# EAGLE board BlueESC (EAGLE 7.1.0)
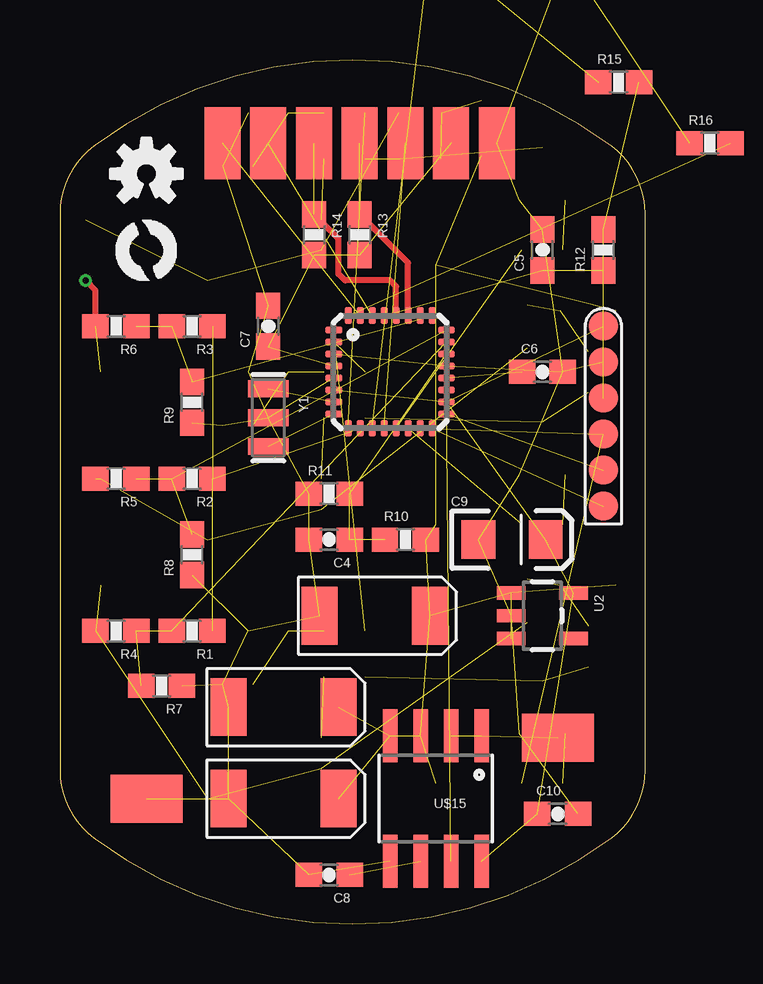
[diagram p0: board, top side]
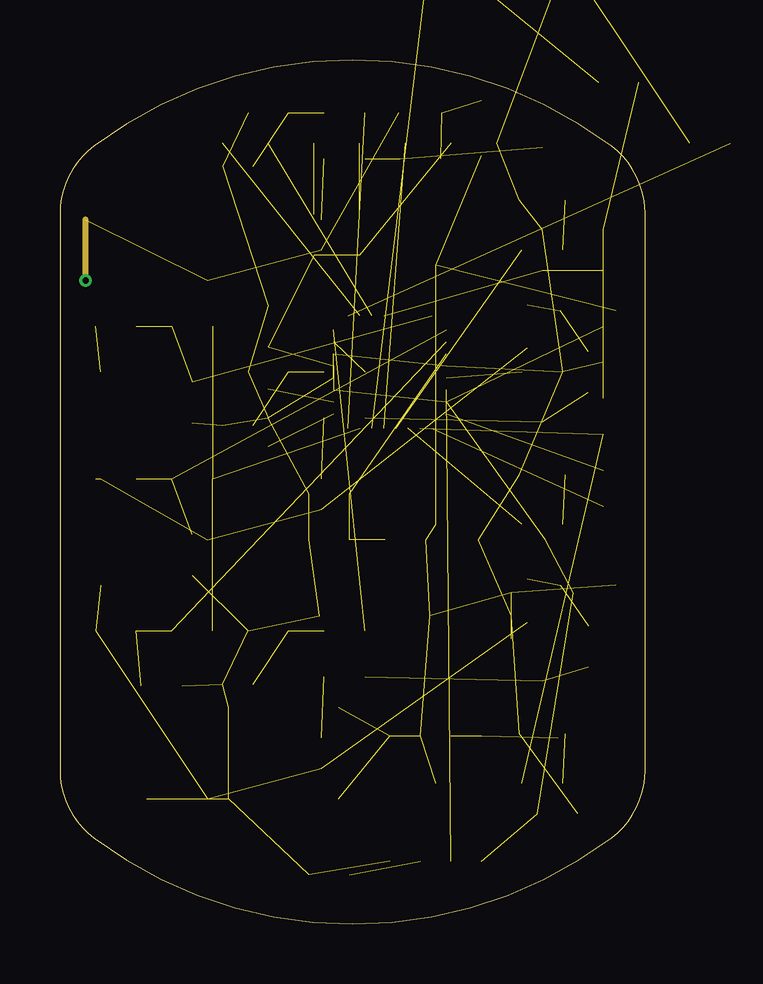
[diagram p1: board, inner layer Route15]
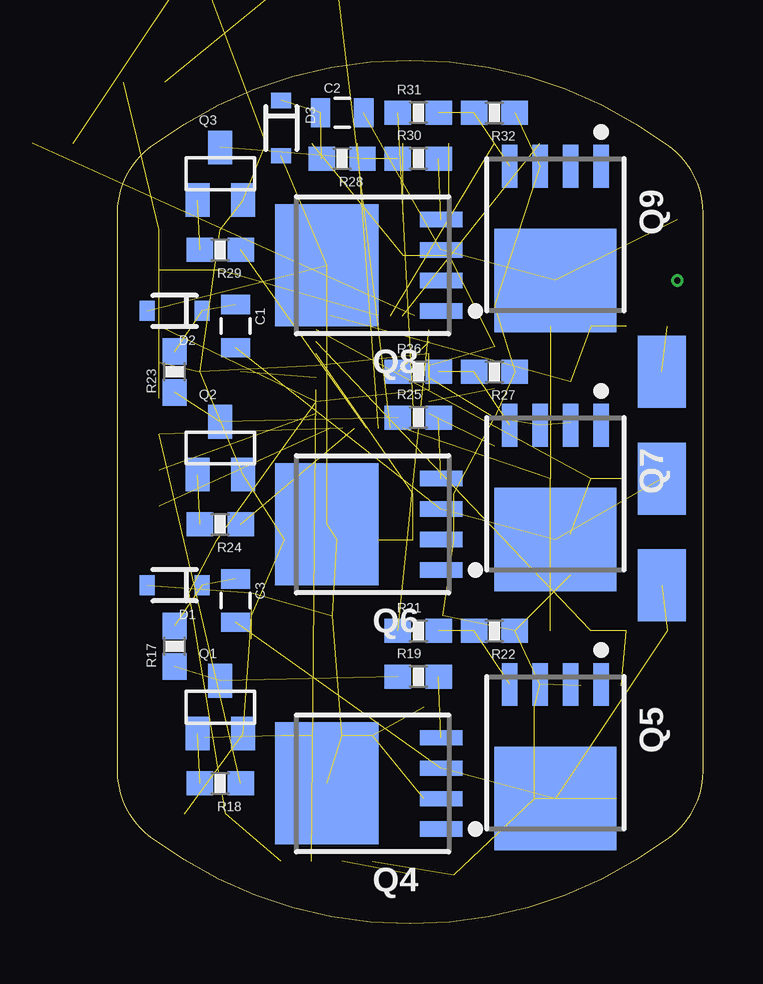
[diagram p2: board, bottom side, seen from below]

Size 24.4 x 36 mm. Coordinates in mm from the lower left corner, seen from the top.
Outline: 23,32.4 arc74 1.4,32.4 arc53 0,29.6 0,6.4 arc53 1.4,3.6 arc74 23,3.6 arc53 24.4,6.4 24.4,29.6 arc53 23,32.4
Copper layers (1*2*15*16): Top 0.0356mm / dielectric 1.5011mm / Route2 0.0356mm / dielectric 0.1499mm / Route15 0.0356mm / dielectric 0.2007mm / Bottom 0.0356mm
Design rules "OSH-Park *": minimum track width 6mil, minimum drill 10mil, track to track 6mil, track to pad 6mil, pad to pad 6mil, via to via 6mil, smd to smd 6mil, copper to edge 15mil, drill to drill 6mil, minimum pad ring 7mil, minimum via ring 5mil, stop-mask expansion 3mil, vias tented up to drill 0mil, thermal gap 10mil

## Footprints (pad centres in the part's own frame; a part is rotated, then mirrored left to right if it is on the bottom)
0805 = smd 0.8 x 1.2: 1 -0.9,0; 2 0.9,0
0603-CAP = smd 1.1 x 1: 1 -0.85,0; 2 0.85,0
EIA3216 = smd 1.4 x 1.6: A 1.4,0; C -1.4,0
EIA6032 = smd 1.5 x 2.4: P$1 -2.3,0; P$2 2.3,0
SOD-323 = smd 0.63 x 0.83: A 1.15,0; C -1.15,0
LED3MM-NS = drill 0.813: A -1.27,0; K 1.27,0
SOT23 = smd 1 x 1.4: 1 -0.95,-1.1; 2 0.95,-1.1; 3 0,1.1
POWERPAK-SO-08 = smd 0.635 x 1.778: 1 -1.905,-2.857; 2 -0.635,-2.857; 3 0.635,-2.857; 4 1.905,-2.857 | smd 5.08 x 4.318: 5-8 0,1.905
0603-RES = smd 1.1 x 1: 1 -0.85,0; 2 0.85,0
MLF32 = smd 0.7 x 0.3: 1 -2.35,1.75; 2 -2.35,1.25; 3 -2.35,0.75; 4 -2.35,0.25; 5 -2.35,-0.25; 6 -2.35,-0.75; 7 -2.35,-1.25; 8 -2.35,-1.75; 17 2.35,-1.75; 18 2.35,-1.25; 19 2.35,-0.75; 20 2.35,-0.25; 21 2.35,0.25; 22 2.35,0.75; 23 2.35,1.25; 24 2.35,1.75 | smd 0.3 x 0.7: 9 -1.75,-2.35; 10 -1.25,-2.35; 11 -0.75,-2.35; 12 -0.25,-2.35; 13 0.25,-2.35; 14 0.75,-2.35; 15 1.25,-2.35; 16 1.75,-2.35; 25 1.75,2.35; 26 1.25,2.35; 27 0.75,2.35; 28 0.25,2.35; 29 -0.25,2.35; 30 -0.75,2.35; 31 -1.25,2.35; 32 -1.75,2.35
SOT23-5 = smd 0.55 x 1.2: 1 -0.95,-1.3; 2 0,-1.3; 3 0.95,-1.3; 4 0.95,1.3; 5 -0.95,1.3
PAD-2X3MM = smd 3 x 2: P$1 0,0
PAD-1.5X3MM = smd 3 x 1.5: P$1 0,0
AVR-ISP-TINY = smd 1.2 x 1.2: GND 1.5,0; MISO 7.5,0; MOSI 4.5,0; RESET 3,0; SCK 6,0; VCC 0,0
SO08 = smd 0.61 x 2.21: 1 -1.905,-2.616; 2 -0.635,-2.616; 3 0.635,-2.616; 4 1.905,-2.616; 5 1.905,2.616; 6 0.635,2.616; 7 -0.635,2.616; 8 -1.905,2.616
RESONATOR-SMD = smd 0.7 x 1.7: 1 -1.2,0; 2 0,0; 3 1.2,0

## Placement (x,y rotation side)
C1  1uF  [0805]  19.48,24.91 270 bottom
C2  1uF  [0805]  15.04,33.8 0 bottom
C3  1uF  [0805]  19.48,13.48 270 bottom
C4  0.1uF  [0603-CAP]  11.23,16.02 180 top
C5  0.1uF  [0603-CAP]  20.12,28.08 90 top
C6  0.1uF  [0603-CAP]  20.12,23 0 top
C7  0.1uF  [0603-CAP]  8.69,24.91 90 top
C8  0.1uF  [0603-CAP]  11.23,2.05 180 top
C9  1uF  [EIA3216]  18.85,16.02 0 top
C10  0.1uF  [0603-CAP]  20.75,4.59 0 top
C15  33uF  [EIA6032]  9.32,5.22 180 top
C16  33uF  [EIA6032]  9.32,9.03 180 top
C17  33uF  [EIA6032]  13.13,12.84 180 top
D1  Schottky  [SOD-323]  22.02,14.11 180 bottom
D2  Schottky  [SOD-323]  22.02,25.54 180 bottom
D3  Schottky  [SOD-323]  17.58,33.16 270 bottom
LED1  Yellow  [LED3MM-NS]  20.75,42.69 0 top  (outside the outline)
LED2  Green  [LED3MM-NS]  14.4,42.69 0 top  (outside the outline)
LOGO1  OSHW-LOGOS  [OSHW-LOGO-S]  3.61,31.26 0 top
Q1  BC817-40W  [SOT23]  20.12,9.03 0 bottom
Q2  BC817-40W  [SOT23]  20.12,19.83 0 bottom
Q3  BC817-40W  [SOT23]  20.12,31.26 0 bottom
Q4  SI7370  [POWERPAK-SO-08]  13.77,5.86 90 bottom
Q5  SI7370  [POWERPAK-SO-08]  6.15,7.13 180 bottom
Q6  SI7370  [POWERPAK-SO-08]  13.77,16.65 90 bottom
Q7  SI7370  [POWERPAK-SO-08]  6.15,17.92 180 bottom
Q8  SI7370  [POWERPAK-SO-08]  13.77,27.45 90 bottom
Q9  SI7370  [POWERPAK-SO-08]  6.15,28.72 180 bottom
R1  47K  [0603-RES]  5.51,12.21 180 top
R2  47K  [0603-RES]  5.51,18.56 180 top
R3  47K  [0603-RES]  5.51,24.91 180 top
R4  47K  [0603-RES]  2.34,12.21 180 top
R5  47K  [0603-RES]  2.34,18.56 180 top
R6  47K  [0603-RES]  2.34,24.91 180 top
R7  4.7K  [0603-RES]  4.24,9.92 180 top
R8  4.7K  [0603-RES]  5.51,15.38 90 top
R9  4.7K  [0603-RES]  5.51,21.73 90 top
R10  10K  [0603-RES]  14.4,16.02 0 top
R11  1K  [0603-RES]  11.23,17.92 0 top
R12  10K  [0603-RES]  22.66,28.08 90 top
R13  10K  [0603-RES]  12.5,28.72 270 top
R14  10K  [0603-RES]  10.59,28.72 270 top
R15  330  [0603-RES]  23.29,35.07 0 top
R16  330  [0603-RES]  27.1,32.53 0 top
R17  2.2K  [0603-RES]  22.02,11.57 90 bottom
R18  4.7K  [0603-RES]  20.12,5.86 180 bottom
R19  100  [0603-RES]  11.86,10.3 0 bottom
R21  100  [0603-RES]  11.86,12.21 0 bottom
R22  10K  [0603-RES]  8.69,12.21 180 bottom
R23  2.2K  [0603-RES]  22.02,23 90 bottom
R24  4.7K  [0603-RES]  20.12,16.65 180 bottom
R25  100  [0603-RES]  11.86,21.1 0 bottom
R26  100  [0603-RES]  11.86,23 0 bottom
R27  10K  [0603-RES]  8.69,23 180 bottom
R28  2.2K  [0603-RES]  15.04,31.89 180 bottom
R29  4.7K  [0603-RES]  20.12,28.08 180 bottom
R30  100  [0603-RES]  11.86,31.89 0 bottom
R31  100  [0603-RES]  11.86,33.8 0 bottom
R32  10K  [0603-RES]  8.69,33.8 180 bottom
U1  ATMEGA168MLF  [MLF32]  13.77,23 0 top
U2  V_REG_LDOSMD  [SOT23-5]  20.12,12.84 270 top
U$1  PAD2X3MM  [PAD-2X3MM]  20.75,7.76 0 top
U$2  PAD2X3MM  [PAD-2X3MM]  3.61,5.22 0 top
U$3  PAD1.5X3MM  [PAD-1.5X3MM]  18.21,32.53 90 top
U$4  LOGOBR-LOGO-S  [BR-LOGO-SMALL]  2.34,26.81 0 top
U$5  PAD2X3MM  [PAD-2X3MM]  1.7,14.11 270 bottom
U$6  PAD2X3MM  [PAD-2X3MM]  1.7,18.56 270 bottom
U$7  PAD2X3MM  [PAD-2X3MM]  1.7,23 270 bottom
U$8  PAD1.5X3MM  [PAD-1.5X3MM]  16.31,32.53 90 top
U$9  PAD1.5X3MM  [PAD-1.5X3MM]  12.5,32.53 90 top
U$10  PAD1.5X3MM  [PAD-1.5X3MM]  10.59,32.53 90 top
U$11  PAD1.5X3MM  [PAD-1.5X3MM]  14.4,32.53 90 top
U$12  PAD1.5X3MM  [PAD-1.5X3MM]  8.69,32.53 90 top
U$13  PAD1.5X3MM  [PAD-1.5X3MM]  6.78,32.53 90 top
U$14  AVR-ISPTINY-SMD  [AVR-ISP-TINY]  22.66,24.91 270 top
U$15  ACS712  [SO08]  15.67,5.22 180 top
Y1  RESONATORSMD  [RESONATOR-SMD]  8.69,21.1 270 top

## Library data of the parts
C1-C10 C15-C17 = SparkFun-Capacitors
D1-D3 = SparkFun-DiscreteSemi; PROD_ID: DIO-09646
LED1 LED2 R15 R16 Y1 = SparkFun
LOGO1 = SparkFun-Aesthetics
Q1-Q3 = SparkFun-DiscreteSemi
Q4-Q9 = transistor-fet-bobstarr
R1-R14 R17-R19 R21-R32 = SparkFun-Resistors
U1 = SparkFun-DigitalIC
U2 = SparkFun-PowerIC
U$1-U$14 = BR-Eagle-Library
U$15 = SparkFun-AnalogIC

## Nets
CENTER: R1.1 R2.1 R3.1 U1.10
CURRENT_ADC: U1.19 U$15.7
GATE_AH: Q4.4 R19.2
GATE_AL: Q5.4 R21.2 R22.2
GATE_BH: Q6.4 R25.2
GATE_BL: Q7.4 R26.2 R27.2
GATE_CH: Q8.4 R30.2
GATE_CL: Q9.4 R31.2 R32.2
GND: C4.2 C5.2 C6.2 C7.2 C8.2 C9.C C10.2 C15.P$2 C16.P$2 C17.P$2 LED1.K Q1.2 Q2.2 Q3.2 Q5.3 Q7.3 Q9.3 R7.1 R8.1 R9.1 R11.1 R22.1 R27.1 R32.1 U1.3 U1.5 U1.21 U2.2 U$2.P$1 U$3.P$1 U$14.GND U$15.5 Y1.2
LED_STATUS: LED2.K U1.11
LED_WARN: R16.2 U1.32
MISO: U1.16 U$14.MISO
N$1: C8.1 U$15.6
N$2: Q1.1 R18.2
N$3: LED1.A R16.1
N$4: Q1.3 R17.1 R19.1
N$5: Q2.1 R24.2
N$6: Q2.3 R23.1 R25.1
N$7: Q3.1 R29.2
N$8: C6.1 U1.20
N$9: Q3.3 R28.1 R30.1
N$10: U1.7 Y1.1
N$11: U1.8 Y1.3
N$12: C3.1 D1.C R17.2
N$15: C1.1 D2.C R23.2
N$16: LED2.A R15.1
N$19: C2.1 D3.C R28.2
PHASE_A: C3.2 Q4.3 Q5.5-8 R4.2 U$5.P$1
PHASE_B: C1.2 Q6.3 Q7.5-8 R5.2 U$6.P$1
PHASE_C: C2.2 Q8.3 Q9.5-8 R6.2 U$7.P$1
PWM: U1.12 U$11.P$1
PWM_AH: R18.1 U1.15 U$14.MOSI
PWM_AL: R21.1 U1.1
PWM_BH: R24.1 U1.14
PWM_BL: R26.1 U1.2
PWM_CH: R29.1 U1.13
PWM_CL: R31.1 U1.9
RESET: C5.1 R12.1 U1.29 U$14.RESET
RX: U1.30 U$12.P$1
SCK: U1.17 U$14.SCK
SCL: R14.1 U1.28 U$10.P$1
SDA: R13.1 U1.27 U$9.P$1
SENSE_A: R1.2 R4.1 R7.2 U1.23
SENSE_B: R2.2 R5.1 R8.2 U1.24
SENSE_C: R3.2 R6.1 R9.2 U1.25
TEMP_ADC: U1.26
TX: U1.31 U$13.P$1
VBAT: C15.P$1 C16.P$1 C17.P$1 D1.A D2.A D3.A Q4.5-8 Q6.5-8 Q8.5-8 R10.2 U2.1 U2.3 U$15.3 U$15.4
VBAT+: U$1.P$1 U$15.1 U$15.2
VBAT_ADC: C4.1 R10.1 R11.2 U1.22
VCC5V: C7.1 C9.A C10.1 R12.2 R13.2 R14.2 R15.2 U1.4 U1.6 U1.18 U2.5 U$8.P$1 U$14.VCC U$15.8

## Tracks (layer width: path | path; a pad name or v marks a point on that pad's centre or on a via)
CENTER  (3 unrouted)
CURRENT_ADC  (1 unrouted)
GATE_AH  (1 unrouted)
GATE_AL  (2 unrouted)
GATE_BH  (1 unrouted)
GATE_BL  (2 unrouted)
GATE_CH  (1 unrouted)
GATE_CL  (2 unrouted)
GND  (32 unrouted)
LED_STATUS  (1 unrouted)
LED_WARN  (1 unrouted)
MISO  (1 unrouted)
N$1  (1 unrouted)
N$2  (1 unrouted)
N$3  (1 unrouted)
N$4  (2 unrouted)
N$5  (1 unrouted)
N$6  (2 unrouted)
N$7  (1 unrouted)
N$8  (1 unrouted)
N$9  (2 unrouted)
N$10  (1 unrouted)
N$11  (1 unrouted)
N$12  (2 unrouted)
N$15  (2 unrouted)
N$16  (1 unrouted)
N$19  (2 unrouted)
PHASE_A  (4 unrouted)
PHASE_B  (4 unrouted)
PHASE_C  (via drill 0.25 pad 0.03)  (4 unrouted)
  Top 0.254: R6.2 1.49,26.39 v1.07,26.81
  Route15 0.254: v1.07,26.81 1.07,29.35
PWM  (1 unrouted)
PWM_AH  (2 unrouted)
PWM_AL  (1 unrouted)
PWM_BH  (1 unrouted)
PWM_BL  (1 unrouted)
PWM_CH  (1 unrouted)
PWM_CL  (1 unrouted)
RESET  (3 unrouted)
RX  (1 unrouted)
SCK  (1 unrouted)
SCL  (1 unrouted)
  Top 0.254: U1.28 14.02,26.56 13.77,26.81 11.89,26.81 11.61,27.09 11.61,28.55 R14.1
SDA  (1 unrouted)
  Top 0.254: U1.27 14.52,27.55 R13.1
SENSE_A  (3 unrouted)
SENSE_B  (3 unrouted)
SENSE_C  (3 unrouted)
TX  (1 unrouted)
VBAT  (13 unrouted)
VBAT+  (2 unrouted)
VBAT_ADC  (3 unrouted)
VCC5V  (13 unrouted)